# Altium PCB 驱动pcb2.PcbDoc
Units mm, origin at the board's own origin, x right, y up, seen from the top; angles counter-clockwise.
Board outline 87.76 x 99.34 mm, 2 copper layers (Top Layer, Bottom Layer); 70 components, 33 nets, 252 pads, 480 vias.
Unrouted connection lines stored in the file: 32.
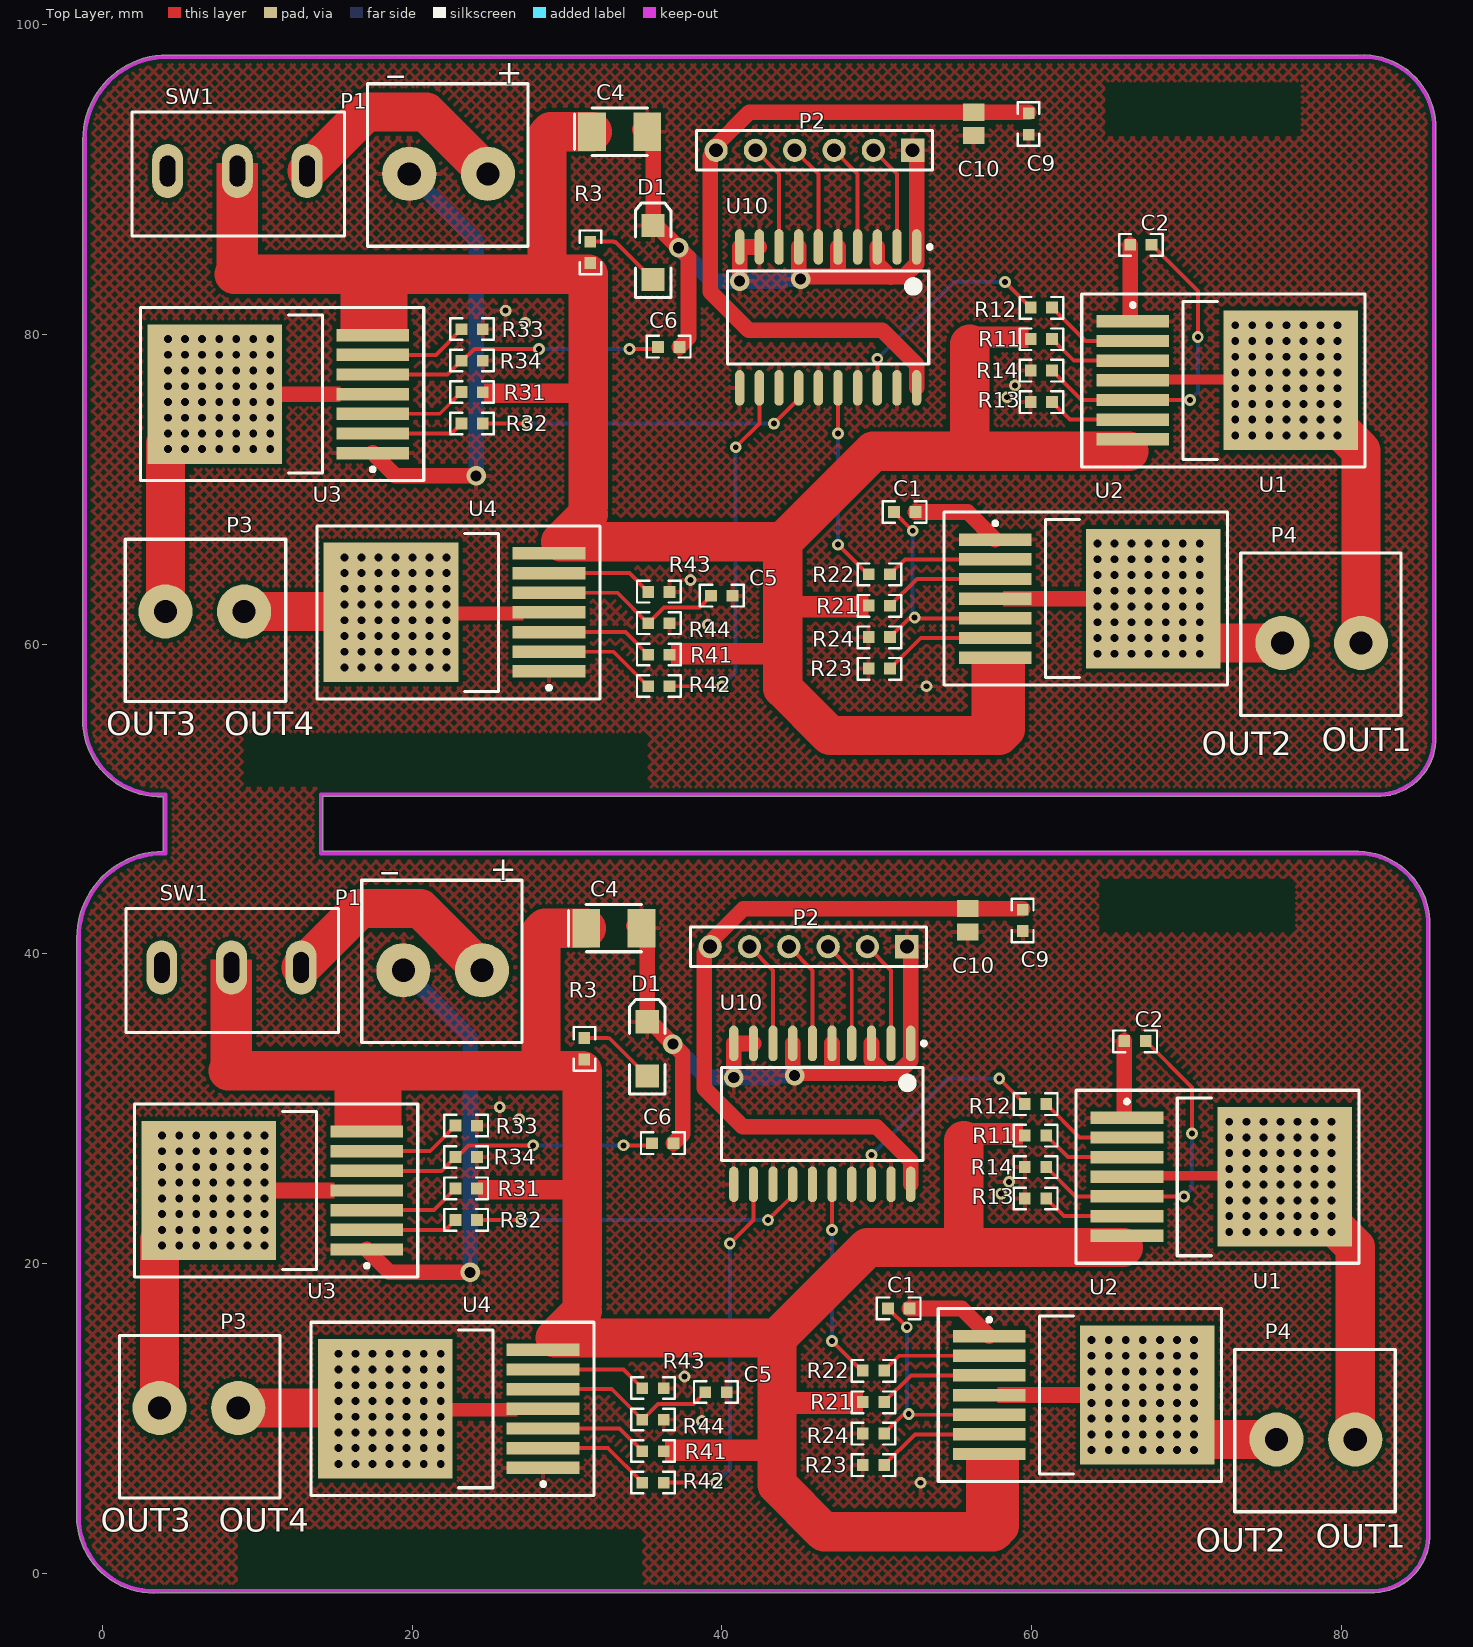
[diagram p0: Top Layer view]
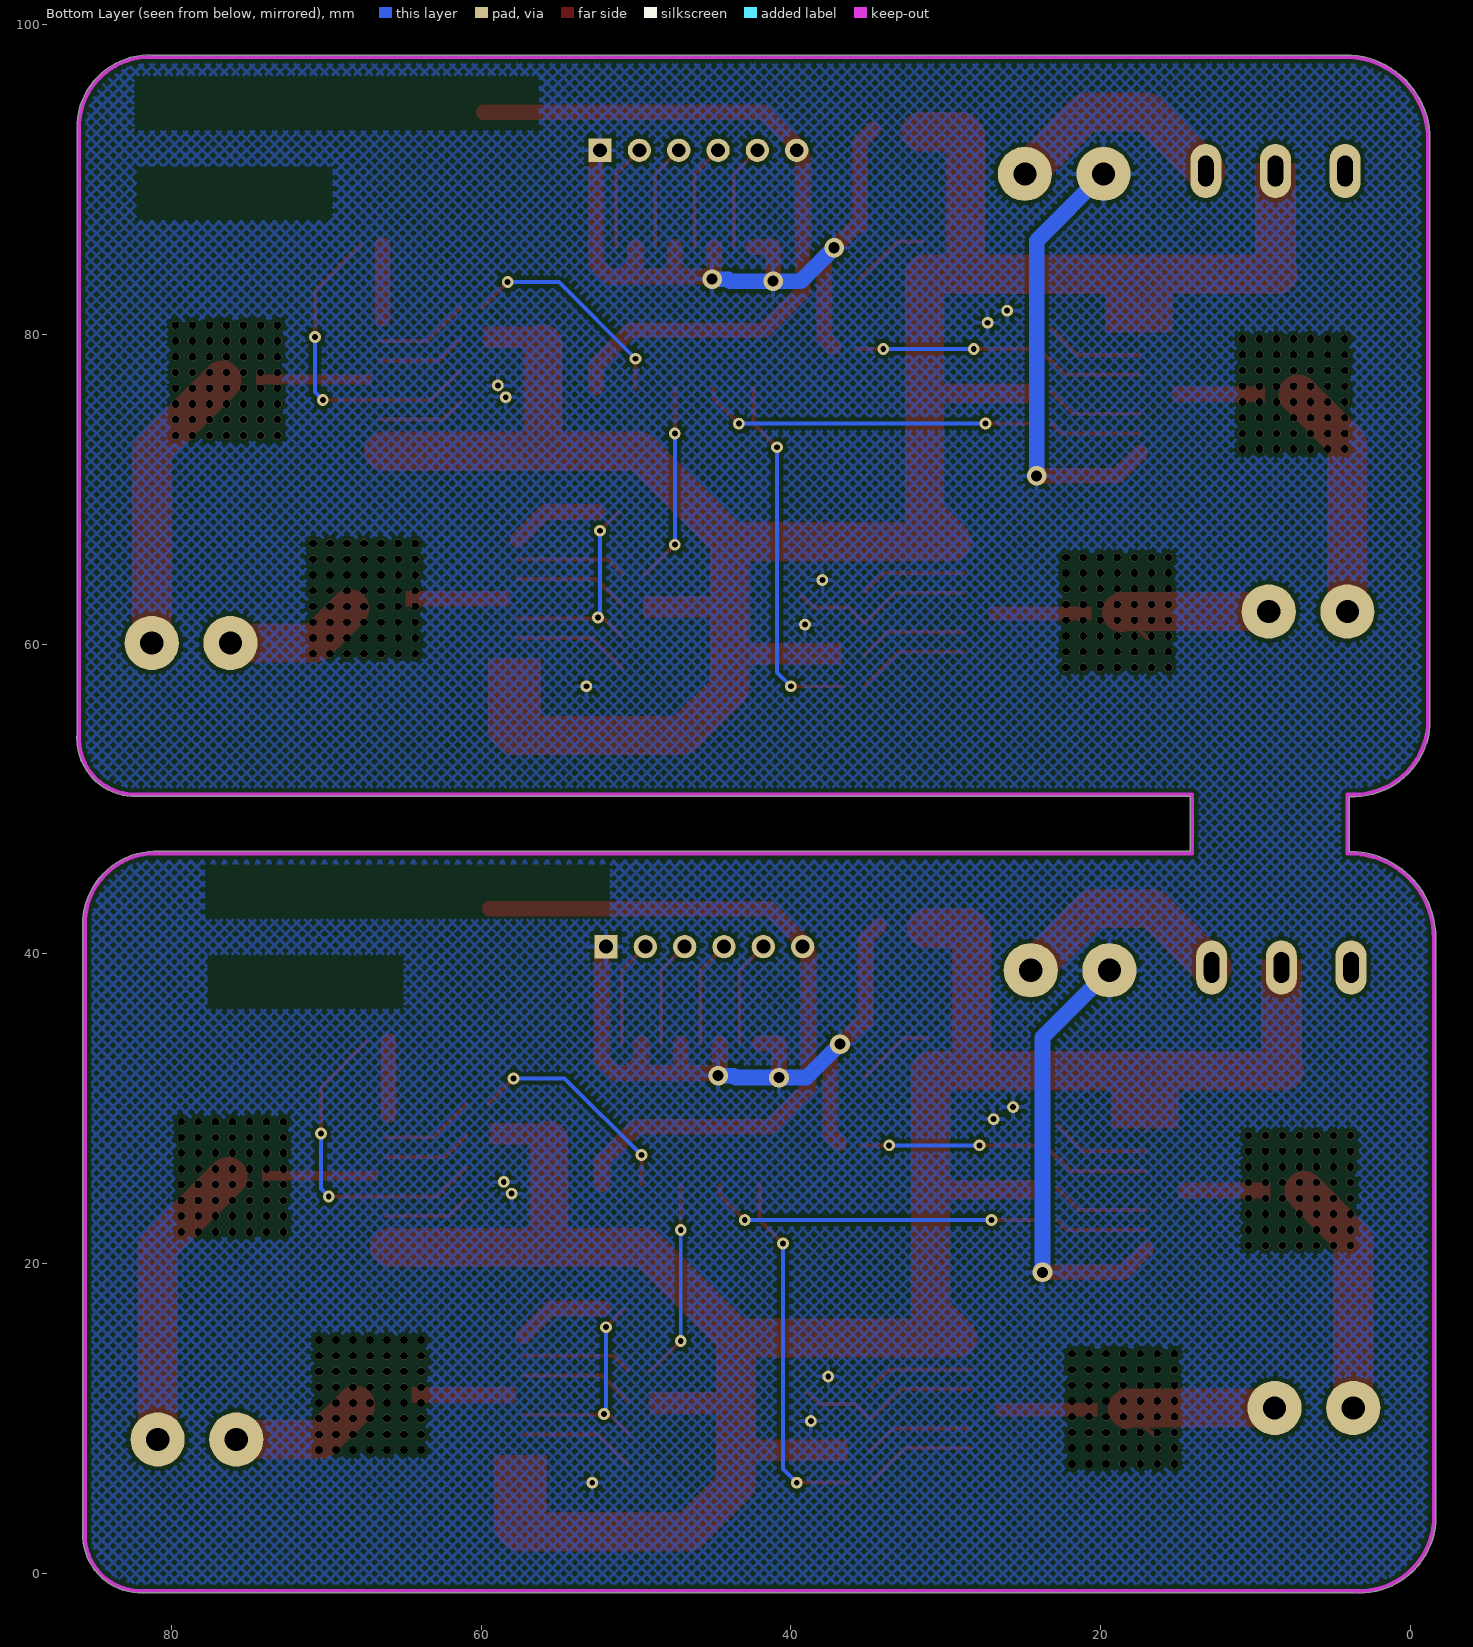
[diagram p1: Bottom Layer view, seen from below]

## Layer stack, top to bottom
Top Solder: solder mask 0.0102, Solder Resist, Dk 3.5
Top Layer: signal copper 0.0356
Dielectric1: dielectric 0.32, FR-4, Dk 4.8
Bottom Layer: signal copper 0.0356
Bottom Solder: solder mask 0.0102, Solder Resist, Dk 3.5

## Board outline
-1.651,3.292 ccw(c3.302,3.683) 3.688,-1.27 82.169,-1.27 ccw(c82.169,-1.143) 82.176,-1.27 ccw(c81.978,2.476) 85.725,2.279 ccw(c81.978,2.476) 85.73,2.476 ccw(c81.978,2.476) 85.725,2.67 85.725,42.164 ccw(c85.598,42.164) 85.725,42.171 ccw(c81.026,41.91) 80.768,46.609 14.224,46.609 14.224,50.165 82.55,50.165 ccw(c82.55,50.292) 82.557,50.165 ccw(c82.359,53.911) 86.106,53.714 ccw(c82.359,53.911) 86.111,53.911 ccw(c82.359,53.911) 86.106,54.105 86.106,93.599 ccw(c85.979,93.599) 86.106,93.606 ccw(c81.407,93.345) 81.149,98.044 4.191,98.044 ccw(c4.191,92.583) -1.27,92.583 -1.27,54.737 ccw(c-1.143,54.737) -1.27,54.727 ccw(c3.683,55.118) 3.937,50.156 3.937,46.609 ccw(c3.937,41.021) -1.651,41.021 -1.651,3.302 ccw(c-1.524,3.302)

## Design rules (kind name [scope] priority, off if disabled: settings)
Clearance [All] p1: gap=0.254 ignorepadtopadclearanceinfootprint=FALSE except(0: Arc-Hole Track-Hole SMDPad-Hole THPad-Hole Via-Hole Fill-Hole Poly-Hole Region-Hole Text-Hole)
FabricationTestPointUsage TestPointUsage [All] p1: valid=0 allowmultiple=FALSE
FabricationTestpoint Testpoint [All] p1: side=3 testpointundercomponent=TRUE minsize=1.016 maxsize=2.54 preferedsize=1.524 minholesize=0 maxholesize=1.016 preferedholesize=0.813 testpointgrid=0.025 allowsidetop=TRUE allowsidebottom=TRUE usegrid=TRUE gridtolerance=0
PolygonConnect [All] p1: connectstyle=Relief reliefconductorwidth=0.254 reliefentries=4 polygonreliefangle="90 Angle" airgapwidth=0.254
RoutingVias [All] p1: holewidth=0.711 width=1.27 viastyle="Through Hole" minholewidth=0.711 minwidth=1.27 maxholewidth=0.711 maxwidth=1.27
SilkToSolderMaskClearance SilkscreenOverComponentPads [IsPad] p1: minsilkscreentomaskgap=0.254 clearancetoexposedcopper=TRUE
SolderMaskExpansion [All] p1: expansion=0.102 istentingtop=FALSE
Width [All] p1: maxlimit=3.81 minlimit=0.254 preferedwidth=0.254
27 further rules are at their usual default settings.

## Classes and differential pairs
component class "驱动模块 原理图": C1 C2 C4 C5 C6 C9 C10 D1 P1 P2 P3 P4 R3 R11 R12 R13 R14 R21 R22 R23 R24 R31 R32 R33 R34 R41 R42 R43 R44 SW1 U1 U2 U3 U4 U10

## Components (designator, comment, footprint, x,y, rotation, side; value= is the part's Value field where it differs from the comment)
C1 "100pF" 0603 51.435,17.09 r180 top
C1 "100pF" 0603 51.816,68.525 r180 top
C2 "100pF" 0603 66.675,34.362 r0 top
C2 "100pF" 0603 67.056,85.797 r0 top
C4 "Cap Pol" CAP-3528 33.02,41.656 r0 top
C4 "Cap Pol" CAP-3528 33.401,93.091 r0 top
C5 "100pF" 0603 39.624,11.684 r180 top
C5 "100pF" 0603 40.005,63.119 r180 top
C6 "100pF" 0603 36.195,27.758 r180 top
C6 "100pF" 0603 36.576,79.193 r180 top
C9 "104" 0603 59.436,42.164 r270 top
C9 "104" 0603 59.817,93.599 r270 top
C10 "Cap Pol3" CAPC2012L 55.88,42.164 r270 top
C10 "Cap Pol3" CAPC2012L 56.261,93.599 r270 top
D1 "LED2" DSO-F2/D6.1 35.179,33.854 r90 top
D1 "LED2" DSO-F2/D6.1 35.56,85.289 r90 top
P1 "接线端子" 接线端子 24.511,38.934 r270 top
P1 "接线端子" 接线端子 24.892,90.369 r270 top
P2 "Header 6" HDR1X6 51.943,40.458 r180 top
P2 "Header 6" HDR1X6 52.324,91.893 r180 top
P3 "接线端子" 接线端子 3.683,10.668 r90 top
P3 "接线端子" 接线端子 4.064,62.103 r90 top
P4 "接线端子" 接线端子 80.899,8.636 r270 top
P4 "接线端子" 接线端子 81.28,60.071 r270 top
R3 "1K" 0603 31.115,33.854 r90 top
R3 "1K" 0603 31.496,85.289 r90 top
R11 "3.3K" 0603 60.249,28.266 r0 top
R11 "3.3K" 0603 60.63,79.701 r0 top
R12 "3.3K" 0603 60.249,30.298 r0 top
R12 "3.3K" 0603 60.63,81.733 r0 top
R13 "3.3K" 0603 60.249,24.202 r0 top
R13 "3.3K" 0603 60.63,75.637 r0 top
R14 "3.3K" 0603 60.249,26.234 r0 top
R14 "3.3K" 0603 60.63,77.669 r0 top
R21 "3.3K" 0603 49.784,11.049 r0 top
R21 "3.3K" 0603 50.165,62.484 r0 top
R22 "3.3K" 0603 49.784,13.081 r0 top
R22 "3.3K" 0603 50.165,64.516 r0 top
R23 "3.3K" 0603 49.784,6.985 r0 top
R23 "3.3K" 0603 50.165,58.42 r0 top
R24 "3.3K" 0603 49.784,9.017 r0 top
R24 "3.3K" 0603 50.165,60.452 r0 top
R31 "3.3K" 0603 23.495,24.837 r180 top
R31 "3.3K" 0603 23.876,76.272 r180 top
R32 "3.3K" 0603 23.495,22.805 r180 top
R32 "3.3K" 0603 23.876,74.24 r180 top
R33 "3.3K" 0603 23.495,28.901 r180 top
R33 "3.3K" 0603 23.876,80.336 r180 top
R34 "3.3K" 0603 23.495,26.869 r180 top
R34 "3.3K" 0603 23.876,78.304 r180 top
R41 "3.3K" 0603 35.56,7.874 r180 top
R41 "3.3K" 0603 35.941,59.309 r180 top
R42 "3.3K" 0603 35.56,5.842 r180 top
R42 "3.3K" 0603 35.941,57.277 r180 top
R43 "3.3K" 0603 35.56,11.938 r180 top
R43 "3.3K" 0603 35.941,63.373 r180 top
R44 "3.3K" 0603 35.56,9.906 r180 top
R44 "3.3K" 0603 35.941,61.341 r180 top
SW1 "SW-纽子" SW-纽子 12.827,39.116 r180 top
SW1 "SW-纽子" SW-纽子 13.208,90.551 r180 top
U1 "BTN7971" BTN7971 72.009,25.599 r0 top
U1 "BTN7971" BTN7971 72.39,77.034 r0 top
U2 "BTN7971" BTN7971 63.119,11.502 r0 top
U2 "BTN7971" BTN7971 63.5,62.937 r0 top
U3 "BTN7971" BTN7971 11.218,24.71 r180 top
U3 "BTN7971" BTN7971 11.599,76.145 r180 top
U4 "BTN7971" BTN7971 22.606,10.613 r180 top
U4 "BTN7971" BTN7971 22.987,62.048 r180 top
U10 "SN74LS244" SN74LS244 46.482,29.663 r270 top
U10 "SN74LS244" SN74LS244 46.863,81.098 r270 top

## Footprints (in the part's own frame and the unit in brackets; to place one, negate y for a bottom-side part, rotate by r counter-clockwise, add the part's x,y. Pads: shape width x height; smd on the part's side, far side on the other; paste and mask are expansions set on the pad)
0603 [mil]
  rect 30x30 smd: 1(-27,0) 2(27.5,-0.06)
  silkscreen extent -55,-28 56,27
BTN7971 [mm]
  rect 4.7x0.8 smd: 1(-5.85,3.81) 2(-5.85,2.54) 3(-5.85,1.27) 4(-5.85,0) 5(-5.85,-1.27) 6(-5.85,-2.54) 7(-5.85,-3.81)
  rect 8.7x9 smd: 8(4.35,0)
  silkscreen extent -9.14,-5.59 9.14,5.59
CAP-3528 [mm] "钽电容"
  rect 1.8x2.5 smd: 1(-1.778,0) 2(1.778,0)
  silkscreen extent -2.92,-1.52 1.78,1.52, body extent -1.91,-1.4 1.91,1.4, height 1.1
CAPC2012L [mm] "Chip Capacitor, Body 2.0x1.3mm, IPC High Density"
  rect 1.1x1.4 smd: 1(-0.75,0) 2(0.75,0)
  body extent -1.1,-0.72 1.1,0.72, height 1.4
DSO-F2/D6.1 [mm] "SMT LED; 2 Flat Leads"
  rect 1.5x1.5 smd: 1(-1.75,0) 2(1.75,0)
  silkscreen extent -2.9,-1.15 3.2,1.15
HDR1X6 [mm] "Connector; Header; 6 Position"
  rect 1.5x1.5 hole 0.9: 1(0,0)
  round 1.5 hole 0.9: 2(2.54,0) 3(5.08,0) 4(7.62,0) 5(10.16,0) 6(12.7,0)
  silkscreen extent -1.27,-1.27 13.97,1.27
SN74LS244 [mm] "SOIC, 20-Leads, Body 13.0x7.5mm (max), Pitch 1.27mm, IPC Medium Density"
  oval 2.3x0.6 smd: 1(-4.55,5.715) 2(-4.55,4.445) 3(-4.55,3.175) 4(-4.55,1.905) 5(-4.55,0.635) 6(-4.55,-0.635) 7(-4.55,-1.905) 8(-4.55,-3.175) 9(-4.55,-4.445) 10(-4.55,-5.715) 11(4.55,-5.715) 12(4.55,-4.445) 13(4.55,-3.175) 14(4.55,-1.905) 15(4.55,-0.635) 16(4.55,0.635) 17(4.55,1.905) 18(4.55,3.175) 19(4.55,4.445) 20(4.55,5.715)
  silkscreen extent -4.67,-6.5 3,6.69, body extent -3.75,-6.5 3.75,6.5, height 2.65
SW-纽子 [mm]
  oval 2x3.5 hole 1 slot 2 at 90 deg: 1(0,0) 2(4.5,0) 3(9,0)
  silkscreen extent -2.41,-3.81 11.3,4.19
接线端子 [mm]
  round 3.5 hole 1.5: 1(0,0) 2(0,-5.08)
  silkscreen extent -5.82,-7.77 4.67,2.59

## Part data
C1 C1 C2 C2 C5 C5 C6 C6 C9 C9: library part Cap
C4 C4: "极性电解电容"
C10 C10: "Polarized Capacitor (Surface Mount)"
D1 D1: "Typical RED, GREEN, YELLOW, AMBER GaAs LED"
P2 P2: "Header, 6-Pin"
R3 R3 R11 R11 R12 R12 R13 R13 R14 R14 R21 R21 R22 R22 R23 R23 R24 R24 R31 R31 R32 R32 R33 R33 R34 R34 R41 R41 R42 R42 R43 R43 R44 R44: library part R

## Free pads (board coordinates)
  round 0.762 hole 0.381: 0(39.624,5.842) 0(40.005,57.277) 1(38.712,9.822) 1(39.093,61.257) 1(42.981,22.805) 1(43.362,74.24) 2(52.832,5.842) 2(53.213,57.277) 3(25.654,30.099) 3(26.035,81.534) 3(58.547,25.273) 3(58.928,76.708) 4(58.039,24.511) 4(58.42,75.946) 5(37.592,12.7) 5(37.973,64.135) 6(26.914,29.319) 6(27.295,80.754)

## Via types
v1: diameter 0.508, hole 0.508, Top Layer to Bottom Layer, 448 vias
v2: diameter 0.762, hole 0.381, Top Layer to Bottom Layer, 24 vias
v3: diameter 1.27, hole 0.711, Top Layer to Bottom Layer, 8 vias

## Nets (pads, with @x,y where several pads share a name; then routed paths per layer and width w, separated by ;. In a path a pad name is that pad's centre, name@x,y a point inside that pad or via, vN(x,y) a via of type N, cw(c..) or ccw(c..) an arc to the next point about the centre after c; other vN are vias at no path point)
7.2V: P1.1 SW1.1 | length 29.8
  Top Layer w2.54: SW1.1@12.827,39.116 16.637,42.926 20.519,42.926 P1.1@24.511,38.934 ; SW1.1@13.208,90.551 17.018,94.361 20.9,94.361 P1.1@24.892,90.369
GND: C1.1 C2.1 C4.2 C5.1 C6.1 C9.2 C10.2 D1.2 P1.2 P2.1 pad.1@38.712,9.822 pad.1@39.093,61.257 pad.2 pad.3 pad.4 pad.5 pad.6 R13.1 R14.1 R23.1 R24.1 R33.1 R34.1 R43.1 R44.1 U1.1 U2.1 U3.1 U4.1 U10.1 U10.3 U10.5 U10.7 U10.9 U10.10 U10.11 U10.13 U10.15 U10.17 U10.19 | length 176.7
  Top Layer w0.254: C2.1@65.849,34.502 C2.1@65.989,34.362 ; U1.1@65.989,29.579 U1.1@66.159,29.409 ; C2.1@66.23,85.937 C2.1@66.37,85.797 ; U1.1@66.37,81.014 U1.1@66.54,80.844
  Top Layer w1.016: U3.1@17.068,20.9 18.537,19.431 v3(23.749,19.431) ; U3.1@17.449,72.335 18.918,70.866 v3(24.13,70.866) ; C4.2@34.315,41.804 35.179,40.941 35.179,35.604 35.389,35.604 v3(36.83,34.163) 37.465,33.528 37.465,28.342 C6.1@36.881,27.758 ; C4.2@34.696,93.239 35.56,92.376 35.56,87.039 35.77,87.039 v3(37.211,85.598) 37.846,84.963 37.846,79.777 C6.1@37.262,79.193 ; v3@40.767,32.258 40.767,34.213 U10.9@42.037,34.213 ; v3@41.148,83.693 41.148,85.648 U10.9@42.418,85.648 ; U10.7@44.577,34.213 44.577,32.301 47.328,32.301 ; U10.7@44.958,85.648 44.958,83.736 47.709,83.736 ; U10.5@47.117,34.213 47.117,32.512 47.328,32.301 ; U10.5@47.498,85.648 47.498,83.947 47.709,83.736 ; U10.3@49.657,34.213 49.657,33.131 50.487,32.301 ; U10.3@50.038,85.648 50.038,84.566 50.868,83.736 ; C1.1@52.121,17.09 55.491,17.09 U2.1@57.269,15.312 ; P2.1@52.197,40.204 52.197,34.213 52.197,33.131 51.367,32.301 50.573,32.301 50.53,32.258 50.487,32.301 ; C1.1@52.502,68.525 55.872,68.525 U2.1@57.65,66.747 ; P2.1@52.578,91.639 52.578,85.648 52.578,84.566 51.748,83.736 50.954,83.736 50.911,83.693 50.868,83.736 ; U1.1@65.989,29.579 C2.1@65.989,34.362 ; U1.1@66.37,81.014 C2.1@66.37,85.797 ; 47.328,32.301 50.487,32.301 ; 47.709,83.736 50.868,83.736
  Bottom Layer w1.016: P1.2@19.431,38.934 23.749,34.616 v3(23.749,19.431) ; P1.2@19.812,90.369 24.13,86.051 v3(24.13,70.866) ; v3@37.084,33.909 38.989,32.004 v3(40.767,32.004) 43.561,32.004 43.688,32.131 v3(44.704,32.131) ; v3@37.465,85.344 39.37,83.439 v3(41.148,83.439) 43.942,83.439 44.069,83.566 v3(45.085,83.566)
IN1: R12.1 U10.18 | length 29
  Top Layer w0.254: U10.18@49.657,25.113 v2(49.657,26.996) ; U10.18@50.038,76.548 v2(50.038,78.431) ; v2(57.912,31.949) R12.1@59.563,30.298 ; v2(58.293,83.384) R12.1@59.944,81.733
  Bottom Layer w0.254: v2(49.657,26.996) 54.61,31.949 55.118,31.949 v2(57.912,31.949) ; v2(50.038,78.431) 54.991,83.384 55.499,83.384 v2(58.293,83.384)
IN2: R22.1 U10.16 | length 25.8
  Top Layer w0.254: v2(47.117,14.986) 49.022,13.081 R22.1@49.098,13.081 ; v2(47.117,22.17) U10.16@47.117,25.113 ; v2(47.498,66.421) 49.403,64.516 R22.1@49.479,64.516 ; v2(47.498,73.605) U10.16@47.498,76.548
  Bottom Layer w0.254: v2(47.117,14.986) v2(47.117,22.17) ; v2(47.498,66.421) v2(47.498,73.605)
IN3: pad.1@42.981,22.805 pad.1@43.362,74.24 R32.1 U10.14 | length 43.5
  Top Layer w0.254: R32.1@24.181,22.805 v2(27.051,22.805) ; R32.1@24.562,74.24 v2(27.432,74.24) ; pad.1@42.981,22.805 44.577,24.401 U10.14@44.577,25.113 ; pad.1@43.362,74.24 44.958,75.836 U10.14@44.958,76.548
  Bottom Layer w0.254: v2(27.051,22.805) pad.1@42.981,22.805 ; v2(27.432,74.24) pad.1@43.362,74.24
IN4: pad.0 R42.1 U10.12 | length 47.3
  Top Layer w0.254: R42.1@36.246,5.842 pad.0@39.624,5.842 ; R42.1@36.627,57.277 pad.0@40.005,57.277 ; v2(40.513,21.281) 42.037,22.805 U10.12@42.037,25.113 ; v2(40.894,72.716) 42.418,74.24 U10.12@42.418,76.548
  Bottom Layer w0.254: pad.0@39.624,5.842 40.513,6.731 v2(40.513,21.281) ; pad.0@40.005,57.277 40.894,58.166 v2(40.894,72.716)
NetC1_2: C1.2 R24.2 U2.5 | length 29.2
  Top Layer w0.254: R24.2@50.482,9.015 51.699,10.232 U2.5@57.269,10.232 ; C1.2@50.736,17.092 v2(51.943,15.885) ; R24.2@50.863,60.45 52.08,61.667 U2.5@57.65,61.667 ; C1.2@51.117,68.527 v2(52.324,67.32)
  Bottom Layer w0.254: v2@51.943,10.287 v2(51.943,15.885) ; v2@52.324,61.722 v2(52.324,67.32)
  other v2: 52.07,10.287 52.451,61.722
NetC2_2: C2.2 R14.2 U1.5 | length 42.3
  Top Layer w0.254: R14.2@60.947,26.233 62.851,24.329 66.159,24.329 v2(69.85,24.329) ; R14.2@61.328,77.668 63.232,75.764 66.54,75.764 v2(70.231,75.764) ; C2.2@67.373,34.361 70.358,31.376 v2(70.358,28.393) ; C2.2@67.754,85.796 70.739,82.811 v2(70.739,79.828)
  Bottom Layer w0.254: v2(69.85,24.329) 70.358,24.837 70.358,25.527 v2(70.358,28.393) ; v2(70.231,75.764) 70.739,76.272 70.739,76.962 v2(70.739,79.828)
NetC5_2: C5.2 R44.2 U4.5 | length 24
  Top Layer w0.254: U4.5@28.456,11.883 32.886,11.883 34.861,9.908 35.876,10.922 38.162,10.922 C5.2@38.925,11.686 ; U4.5@28.837,63.318 33.267,63.318 35.242,61.343 36.257,62.357 38.543,62.357 C5.2@39.306,63.121
NetC6_2: C6.2 R34.2 U3.5 | length 38.2
  Top Layer w0.254: U3.5@17.068,25.98 21.906,25.98 22.796,26.871 22.882,26.871 23.642,27.631 v2(27.813,27.631) ; U3.5@17.449,77.415 22.287,77.415 23.177,78.306 23.263,78.306 24.023,79.066 v2(28.194,79.066) ; v2(33.655,27.631) C6.2@35.495,27.631 ; v2(34.036,79.066) C6.2@35.876,79.066
  Bottom Layer w0.254: v2(27.813,27.631) 28.448,27.631 28.702,27.631 v2(33.655,27.631) ; v2(28.194,79.066) 28.829,79.066 29.083,79.066 v2(34.036,79.066)
NetD1_1: D1.1 R3.2 | length 10
  Top Layer w0.254: R3.2@31.117,34.553 32.63,34.553 32.639,34.544 ; R3.2@31.498,85.988 33.011,85.988 33.02,85.979 ; 32.739,34.544 D1.1@35.179,32.104 ; 33.12,85.979 D1.1@35.56,83.539
NetR11_2: R11.2 U1.3 | length 11.6
  Top Layer w0.254: R11.2@60.947,28.265 62.343,26.869 U1.3@66.159,26.869 ; R11.2@61.328,79.7 62.724,78.304 U1.3@66.54,78.304
NetR12_2: R12.2 U1.2 | length 12.2
  Top Layer w0.254: R12.2@60.947,30.297 63.105,28.139 U1.2@66.159,28.139 ; R12.2@61.328,81.732 63.486,79.574 U1.2@66.54,79.574
NetR13_2: R13.2 U1.6 | length 11.4
  Top Layer w0.254: R13.2@60.947,24.201 62.089,23.059 U1.6@66.159,23.059 ; R13.2@61.328,75.636 62.47,74.494 U1.6@66.54,74.494
NetR21_2: R21.2 U2.3 | length 15
  Top Layer w0.254: R21.2@50.482,11.047 52.207,12.772 U2.3@57.269,12.772 ; R21.2@50.863,62.482 52.588,64.207 U2.3@57.65,64.207
NetR22_2: R22.2 U2.2 | length 14.4
  Top Layer w0.254: R22.2@50.482,13.079 51.445,14.042 U2.2@57.269,14.042 ; R22.2@50.863,64.514 51.826,65.477 U2.2@57.65,65.477
NetR23_2: R23.2 U2.6 | length 15.2
  Top Layer w0.254: R23.2@50.482,6.983 52.461,8.962 U2.6@57.269,8.962 ; R23.2@50.863,58.418 52.842,60.397 U2.6@57.65,60.397
NetR31_2: R31.2 U3.3 | length 12.6
  Top Layer w0.254: U3.3@17.068,23.44 21.398,23.44 R31.2@22.796,24.839 ; U3.3@17.449,74.875 21.779,74.875 R31.2@23.177,76.274
NetR32_2: R32.2 U3.2 | length 12
  Top Layer w0.254: U3.2@17.068,22.17 22.16,22.17 R32.2@22.796,22.807 ; U3.2@17.449,73.605 22.541,73.605 R32.2@23.177,74.242
NetR33_2: R33.2 U3.6 | length 12.8
  Top Layer w0.254: U3.6@17.068,27.25 21.144,27.25 R33.2@22.796,28.903 ; U3.6@17.449,78.685 21.525,78.685 R33.2@23.177,80.338
NetR41_2: R41.2 U4.3 | length 14
  Top Layer w0.254: U4.3@28.456,9.343 33.394,9.343 R41.2@34.861,7.876 ; U4.3@28.837,60.778 33.775,60.778 R41.2@35.242,59.311
NetR42_2: R42.2 U4.2 | length 14.7
  Top Layer w0.254: U4.2@28.456,8.073 32.632,8.073 R42.2@34.861,5.844 ; U4.2@28.837,59.508 33.013,59.508 R42.2@35.242,57.279
NetR43_2: R43.2 U4.6 | length 13.8
  Top Layer w0.254: U4.6@28.456,13.153 33.648,13.153 R43.2@34.861,11.94 ; U4.6@28.837,64.588 34.029,64.588 R43.2@35.242,63.375
OUT1: P4.1 U1.4 U1.8 | length 37.7
  Top Layer w2.54: U1.8@76.359,25.599 76.47,25.488 80.899,21.059 P4.1@80.899,8.636 ; U1.8@76.74,77.034 76.851,76.923 81.28,72.494 P4.1@81.28,60.071
  other v1: 72.771,22.043 73.872,22.043 74.972,22.043 76.073,22.043 77.174,22.043 78.274,22.043 79.375,22.043 72.771,23.059 73.872,23.059 74.972,23.059 76.073,23.059 77.174,23.059 78.274,23.059 79.375,23.059 72.771,24.075 73.872,24.075 74.972,24.075 76.073,24.075 77.174,24.075 78.274,24.075 79.375,24.075 72.771,25.091 73.872,25.091 74.972,25.091 76.073,25.091 77.174,25.091 78.274,25.091 79.375,25.091 72.771,26.107 73.872,26.107 74.972,26.107 76.073,26.107 77.174,26.107 78.274,26.107 79.375,26.107 72.771,27.123 73.872,27.123 74.972,27.123 76.073,27.123 77.174,27.123 78.274,27.123 79.375,27.123 72.771,28.139 73.872,28.139 74.972,28.139 76.073,28.139 77.174,28.139 78.274,28.139 79.375,28.139 72.771,29.155 73.872,29.155 74.972,29.155 76.073,29.155 77.174,29.155 78.274,29.155 79.375,29.155 73.152,73.478 74.253,73.478 75.353,73.478 76.454,73.478 77.555,73.478 78.655,73.478 79.756,73.478 73.152,74.494 74.253,74.494 75.353,74.494 76.454,74.494 77.555,74.494 78.655,74.494 79.756,74.494 73.152,75.51 74.253,75.51 75.353,75.51 76.454,75.51 77.555,75.51 78.655,75.51 79.756,75.51 73.152,76.526 74.253,76.526 75.353,76.526 76.454,76.526 77.555,76.526 78.655,76.526 79.756,76.526 73.152,77.542 74.253,77.542 75.353,77.542 76.454,77.542 77.555,77.542 78.655,77.542 79.756,77.542 73.152,78.558 74.253,78.558 75.353,78.558 76.454,78.558 77.555,78.558 78.655,78.558 79.756,78.558 73.152,79.574 74.253,79.574 75.353,79.574 76.454,79.574 77.555,79.574 78.655,79.574 79.756,79.574 73.152,80.59 74.253,80.59 75.353,80.59 76.454,80.59 77.555,80.59 78.655,80.59 79.756,80.59
OUT2: P4.2 U2.4 U2.8 | length 19.1
  Top Layer w0.254: U2.8@67.469,11.502 U2.8@68.13,10.841 ; U2.8@67.85,62.937 U2.8@68.511,62.276
  Top Layer w2.54: U2.8@68.13,10.841 70.335,8.636 P4.2@75.819,8.636 ; U2.8@68.511,62.276 70.716,60.071 P4.2@76.2,60.071
  other v1: 63.881,7.946 64.982,7.946 66.082,7.946 67.183,7.946 68.284,7.946 69.384,7.946 70.485,7.946 63.881,8.962 64.982,8.962 66.082,8.962 67.183,8.962 68.284,8.962 69.384,8.962 70.485,8.962 63.881,9.978 64.982,9.978 66.082,9.978 67.183,9.978 68.284,9.978 69.384,9.978 70.485,9.978 63.881,10.994 64.982,10.994 66.082,10.994 67.183,10.994 68.284,10.994 69.384,10.994 70.485,10.994 63.881,12.01 64.982,12.01 66.082,12.01 67.183,12.01 68.284,12.01 69.384,12.01 70.485,12.01 63.881,13.026 64.982,13.026 66.082,13.026 67.183,13.026 68.284,13.026 69.384,13.026 70.485,13.026 63.881,14.042 64.982,14.042 66.082,14.042 67.183,14.042 68.284,14.042 69.384,14.042 70.485,14.042 63.881,15.058 64.982,15.058 66.082,15.058 67.183,15.058 68.284,15.058 69.384,15.058 70.485,15.058 64.262,59.381 65.363,59.381 66.463,59.381 67.564,59.381 68.665,59.381 69.765,59.381 70.866,59.381 64.262,60.397 65.363,60.397 66.463,60.397 67.564,60.397 68.665,60.397 69.765,60.397 70.866,60.397 64.262,61.413 65.363,61.413 66.463,61.413 67.564,61.413 68.665,61.413 69.765,61.413 70.866,61.413 64.262,62.429 65.363,62.429 66.463,62.429 67.564,62.429 68.665,62.429 69.765,62.429 70.866,62.429 64.262,63.445 65.363,63.445 66.463,63.445 67.564,63.445 68.665,63.445 69.765,63.445 70.866,63.445 64.262,64.461 65.363,64.461 66.463,64.461 67.564,64.461 68.665,64.461 69.765,64.461 70.866,64.461 64.262,65.477 65.363,65.477 66.463,65.477 67.564,65.477 68.665,65.477 69.765,65.477 70.866,65.477 64.262,66.493 65.363,66.493 66.463,66.493 67.564,66.493 68.665,66.493 69.765,66.493 70.866,66.493
OUT3: P3.1 U3.4 U3.8 | length 30.7
  Top Layer w2.54: P3.1@3.683,10.668 3.683,21.525 U3.8@6.868,24.71 ; P3.1@4.064,62.103 4.064,72.96 U3.8@7.249,76.145
  other v1: 3.852,21.154 4.953,21.154 6.054,21.154 7.154,21.154 8.255,21.154 9.356,21.154 10.456,21.154 3.852,22.17 4.953,22.17 6.054,22.17 7.154,22.17 8.255,22.17 9.356,22.17 10.456,22.17 3.852,23.186 4.953,23.186 6.054,23.186 7.154,23.186 8.255,23.186 9.356,23.186 10.456,23.186 3.852,24.202 4.953,24.202 6.054,24.202 7.154,24.202 8.255,24.202 9.356,24.202 10.456,24.202 3.852,25.218 4.953,25.218 6.054,25.218 7.154,25.218 8.255,25.218 9.356,25.218 10.456,25.218 3.852,26.234 4.953,26.234 6.054,26.234 7.154,26.234 8.255,26.234 9.356,26.234 10.456,26.234 3.852,27.25 4.953,27.25 6.054,27.25 7.154,27.25 8.255,27.25 9.356,27.25 10.456,27.25 3.852,28.266 4.953,28.266 6.054,28.266 7.154,28.266 8.255,28.266 9.356,28.266 10.456,28.266 4.233,72.589 5.334,72.589 6.435,72.589 7.535,72.589 8.636,72.589 9.737,72.589 10.837,72.589 4.233,73.605 5.334,73.605 6.435,73.605 7.535,73.605 8.636,73.605 9.737,73.605 10.837,73.605 4.233,74.621 5.334,74.621 6.435,74.621 7.535,74.621 8.636,74.621 9.737,74.621 10.837,74.621 4.233,75.637 5.334,75.637 6.435,75.637 7.535,75.637 8.636,75.637 9.737,75.637 10.837,75.637 4.233,76.653 5.334,76.653 6.435,76.653 7.535,76.653 8.636,76.653 9.737,76.653 10.837,76.653 4.233,77.669 5.334,77.669 6.435,77.669 7.535,77.669 8.636,77.669 9.737,77.669 10.837,77.669 4.233,78.685 5.334,78.685 6.435,78.685 7.535,78.685 8.636,78.685 9.737,78.685 10.837,78.685 4.233,79.701 5.334,79.701 6.435,79.701 7.535,79.701 8.636,79.701 9.737,79.701 10.837,79.701
OUT4: P3.2 U4.4 U4.8 | length 23.7
  Top Layer w0.254: U4.8@16.605,8.962 U4.8@18.256,10.613 ; U4.8@16.986,60.397 U4.8@18.637,62.048
  Top Layer w2.54: P3.2@8.763,10.668 18.201,10.668 U4.8@18.256,10.613 ; P3.2@9.144,62.103 18.582,62.103 U4.8@18.637,62.048
  other v1: 15.24,7.057 16.341,7.057 17.441,7.057 18.542,7.057 19.643,7.057 20.743,7.057 21.844,7.057 15.24,8.073 16.341,8.073 17.441,8.073 18.542,8.073 19.643,8.073 20.743,8.073 21.844,8.073 15.24,9.089 16.341,9.089 17.441,9.089 18.542,9.089 19.643,9.089 20.743,9.089 21.844,9.089 15.24,10.105 16.341,10.105 17.441,10.105 18.542,10.105 19.643,10.105 20.743,10.105 21.844,10.105 15.24,11.121 16.341,11.121 17.441,11.121 18.542,11.121 19.643,11.121 20.743,11.121 21.844,11.121 15.24,12.137 16.341,12.137 17.441,12.137 18.542,12.137 19.643,12.137 20.743,12.137 21.844,12.137 15.24,13.153 16.341,13.153 17.441,13.153 18.542,13.153 19.643,13.153 20.743,13.153 21.844,13.153 15.24,14.169 16.341,14.169 17.441,14.169 18.542,14.169 19.643,14.169 20.743,14.169 21.844,14.169 15.621,58.492 16.722,58.492 17.822,58.492 18.923,58.492 20.024,58.492 21.124,58.492 22.225,58.492 15.621,59.508 16.722,59.508 17.822,59.508 18.923,59.508 20.024,59.508 21.124,59.508 22.225,59.508 15.621,60.524 16.722,60.524 17.822,60.524 18.923,60.524 20.024,60.524 21.124,60.524 22.225,60.524 15.621,61.54 16.722,61.54 17.822,61.54 18.923,61.54 20.024,61.54 21.124,61.54 22.225,61.54 15.621,62.556 16.722,62.556 17.822,62.556 18.923,62.556 20.024,62.556 21.124,62.556 22.225,62.556 15.621,63.572 16.722,63.572 17.822,63.572 18.923,63.572 20.024,63.572 21.124,63.572 22.225,63.572 15.621,64.588 16.722,64.588 17.822,64.588 18.923,64.588 20.024,64.588 21.124,64.588 22.225,64.588 15.621,65.604 16.722,65.604 17.822,65.604 18.923,65.604 20.024,65.604 21.124,65.604 22.225,65.604
PWM1: P2.2 U10.2 | length 13.8
  Top Layer w0.254: P2.2@49.403,40.458 50.927,38.934 U10.2@50.927,34.213 ; P2.2@49.784,91.893 51.308,90.369 U10.2@51.308,85.648
PWM2: P2.3 U10.4 | length 13.8
  Top Layer w0.254: P2.3@46.863,40.458 48.387,38.934 U10.4@48.387,34.213 ; P2.3@47.244,91.893 48.768,90.369 U10.4@48.768,85.648
PWM3: P2.4 U10.6 | length 13.8
  Top Layer w0.254: P2.4@44.323,40.458 45.847,38.934 U10.6@45.847,34.213 ; P2.4@44.704,91.893 46.228,90.369 U10.6@46.228,85.648
PWM4: P2.5 U10.8 | length 13.8
  Top Layer w0.254: P2.5@41.783,40.458 43.307,38.934 U10.8@43.307,34.213 ; P2.5@42.164,91.893 43.688,90.369 U10.8@43.688,85.648
VBAT: C4.1 R3.1 R11.1 R21.1 R31.1 R41.1 SW1.2 U1.7 U2.7 U3.7 U4.7 | length 246.8
  Top Layer w0.254: 28.321,15.185 29.218,15.185 ; 28.702,66.62 29.599,66.62 ; R21.1@48.971,11.176 R21.1@49.098,11.049 ; R21.1@49.352,62.611 R21.1@49.479,62.484
  Top Layer w2.54: 8.128,32.457 28.321,32.457 ; 8.509,83.892 28.702,83.892 ; 30.988,16.955 29.218,15.185 43.561,15.185 ; 30.99,17.473 30.99,32.456 30.988,32.457 28.321,32.457 ; C4.1@31.242,41.656 28.575,41.656 28.321,41.402 28.321,32.457 ; 31.369,68.39 29.599,66.62 43.942,66.62 ; 31.371,68.908 31.371,83.891 31.369,83.892 28.702,83.892 ; C4.1@31.623,93.091 28.956,93.091 28.702,92.837 28.702,83.892 ; 55.626,22.297 55.626,27.94 ; 56.007,73.732 56.007,79.375 ; 57.912,3.048 57.531,2.667 46.609,2.667 43.561,5.715 43.561,15.185 ; 58.293,54.483 57.912,54.102 46.99,54.102 43.942,57.15 43.942,66.62 ; 65.913,21.027 49.403,21.027 43.561,15.185 ; 66.294,72.462 49.784,72.462 43.942,66.62
VCC: C9.1 C10.1 P2.6 U10.20 | length 95.7
  Top Layer w0.254: U10.20@52.197,25.113 U10.20@52.197,25.472 ; U10.20@52.578,76.548 U10.20@52.578,76.907
  Top Layer w1.016: U10.20@52.197,25.113 52.197,26.615 49.983,28.829 41.347,28.829 38.862,31.314 38.862,40.077 39.243,40.458 39.243,40.767 41.39,42.914 55.88,42.914 C9.1@59.436,42.914 ; U10.20@52.578,76.548 52.578,78.05 50.364,80.264 41.728,80.264 39.243,82.749 39.243,91.512 39.624,91.893 39.624,92.202 41.771,94.349 56.261,94.349 C9.1@59.817,94.349
pads on no net: SW1.3

## Polygon pours and split planes (outlines as drawn)
GND on Bottom Layer "Top Layer-No Net" (hatched 45Degree grid 0.508 track 0.203, remove dead copper, pour order 1001): -7.264,100.089 -7.264,-9.639 -6.375,-10.528 -4.343,-8.496 106.528,-8.496 106.528,89.548 94.082,101.994
GND on Top Layer "Top Layer-No Net" (hatched 45Degree grid 0.508 track 0.203, remove dead copper, pour order 1003): -6.604,101.092 -6.35,100.838 92.71,100.838 92.71,-5.08 92.075,-5.715 -8.89,-5.715

## Keep-outs
Keep-Out Layer:
  lines w0.254: 3.937,46.482 ccw(c3.937,41.021) -1.524,41.021 -1.524,3.302 ccw(c3.302,3.683) 3.683,-1.143 82.169,-1.143 ccw(c81.978,2.476) 85.598,2.667 ; 4.064,46.482 4.064,50.292 cw(c3.683,55.118) -1.143,54.737 -1.143,92.583 cw(c4.191,92.583) 4.191,97.917 77.089,97.917 81.534,97.917 ; 80.772,46.482 cw(c81.026,41.91) 85.598,42.164 85.598,2.286 ; 81.153,46.482 76.708,46.482 14.097,46.482 14.097,50.292 82.55,50.292 ccw(c82.359,53.911) 85.979,54.102 ; 81.153,97.917 cw(c81.407,93.345) 85.979,93.599 85.979,53.721

## Other copper
Top Layer:
  rectangle net OUT4: 20.193,10.105 26.797,10.994
  rectangle net OUT3: 9.017,24.202 14.986,25.218
  rectangle net OUT2: 57.785,10.994 64.516,12.01
  rectangle net OUT1: 66.675,25.345 74.168,25.98
  rectangle net VBAT: 55.753,3.175 59.182,7.62
  rectangle net VBAT: 24.257,24.13 30.48,25.4
  rectangle net VBAT: 14.986,28.702 19.304,32.258
  rectangle net VBAT: 6.985,32.004 9.652,39.624
  rectangle net VBAT: 36.322,7.239 43.561,8.636
  rectangle net VBAT: 43.561,10.287 49.098,11.684
  rectangle net VBAT: 55.372,27.686 59.436,29.083
  rectangle net VBAT: 55.753,79.121 59.817,80.518
  rectangle net VBAT: 43.942,61.722 49.479,63.119
  rectangle net VBAT: 36.703,58.674 43.942,60.071
  rectangle net VBAT: 7.366,83.439 10.033,91.059
  rectangle net VBAT: 15.367,80.137 19.685,83.693
  rectangle net VBAT: 24.638,75.565 30.861,76.835
  rectangle net VBAT: 56.134,54.61 59.563,59.055
  rectangle net OUT1: 67.056,76.78 74.549,77.415
  rectangle net OUT2: 58.166,62.429 64.897,63.445
  rectangle net OUT3: 9.398,75.637 15.367,76.653
  rectangle net OUT4: 20.574,61.54 27.178,62.429
  pour cut-out: 32.131,43.262 33.672,43.262 33.782,43.152 33.782,40.05 32.258,40.05
  pour cut-out: 32.512,94.697 34.053,94.697 34.163,94.587 34.163,91.485 32.639,91.485
Multi-Layer:
  text "信标组" at 65.659,93.599 h3.5
  text "黑龙江八一农垦大学 2019" at 11.938,51.562 h2.5
  text "信标组" at 65.637,42.179 h3.5
  text "黑龙江八一农垦大学 2019" at 8.89,0.127 h2.5

## Silkscreen, mask and mechanical layers (free items; w line width, h text height)
Top Overlay:
  text "_" at 18.415,97.028 h1.52
  text "+" at 25.4,96.186 h1.52
  text "OUT3" at 0.254,54.102 h1.52
  text "OUT4" at 7.874,54.102 h1.52
  text "OUT1" at 78.74,53.086 h1.52
  text "OUT2" at 70.993,52.832 h1.52
  text "_" at 18.034,45.593 h1.52
  text "+" at 25.019,44.751 h1.52
  text "OUT3" at -0.127,2.667 h1.52
  text "OUT4" at 7.493,2.667 h1.52
  text "OUT1" at 78.359,1.651 h1.52
  text "OUT2" at 70.612,1.397 h1.52
Mechanical 16:
  drawing of 1874 lines, arcs and shapes, not listed
  text "1" at -49.479,109.165 h1.78
  text "2" at 23.165,109.165 h1.78
  text "3" at 96.317,109.165 h1.78
  text "4" at 169.215,109.165 h1.78
  text "A" at -83.82,86.153 h1.78
  text "A" at 203.2,86.153 h1.78
  text "B" at -83.82,38.096 h1.78
  text "B" at 203.2,38.096 h1.78
  text "C" at -83.82,-10.418 h1.78
  text "C" at 203.2,-10.418 h1.78
  text "ENGINEER:" at 88.265,-47.426 h1.14
  text "TITLE:" at 126.365,-47.426 h1.14
  text "PCB DESIGNER:" at 88.265,-54.919 h1.14
  text "D" at -83.82,-58.424 h1.78
  text "D" at 203.2,-58.424 h1.78
  text "DATE:" at 88.265,-62.666 h1.14
  text "PART NO.:" at 126.365,-62.666 h1.14
  text "REV:" at 179.705,-62.666 h1.14
  text "Altium Limited" at 55.245,-65.206 h1.78
  text ".PRINT_DATE" at 89.535,-65.714 h1.78
  text "12a Rodborough Rd" at 55.245,-67.746 h1.78
  text "Frenchs Forest" at 55.245,-70.286 h1.78
  text "FILE NAME:" at 88.265,-70.286 h1.14
  text "DWG NO:" at 126.365,-70.286 h1.14
  text "SCALE:" at 179.705,-70.286 h1.14
  text "NSW 2086" at 55.245,-72.826 h1.78
  text ".PCB_FILE_NAME_NO_PATH" at 89.535,-73.334 h1.78
  text "1" at -49.479,-78.795 h1.78
  text "2" at 23.165,-78.795 h1.78
  text "3" at 96.317,-78.795 h1.78
  text "4" at 169.215,-78.795 h1.78